# EAGLE board barath pcb 3 (EAGLE 6.5.0)
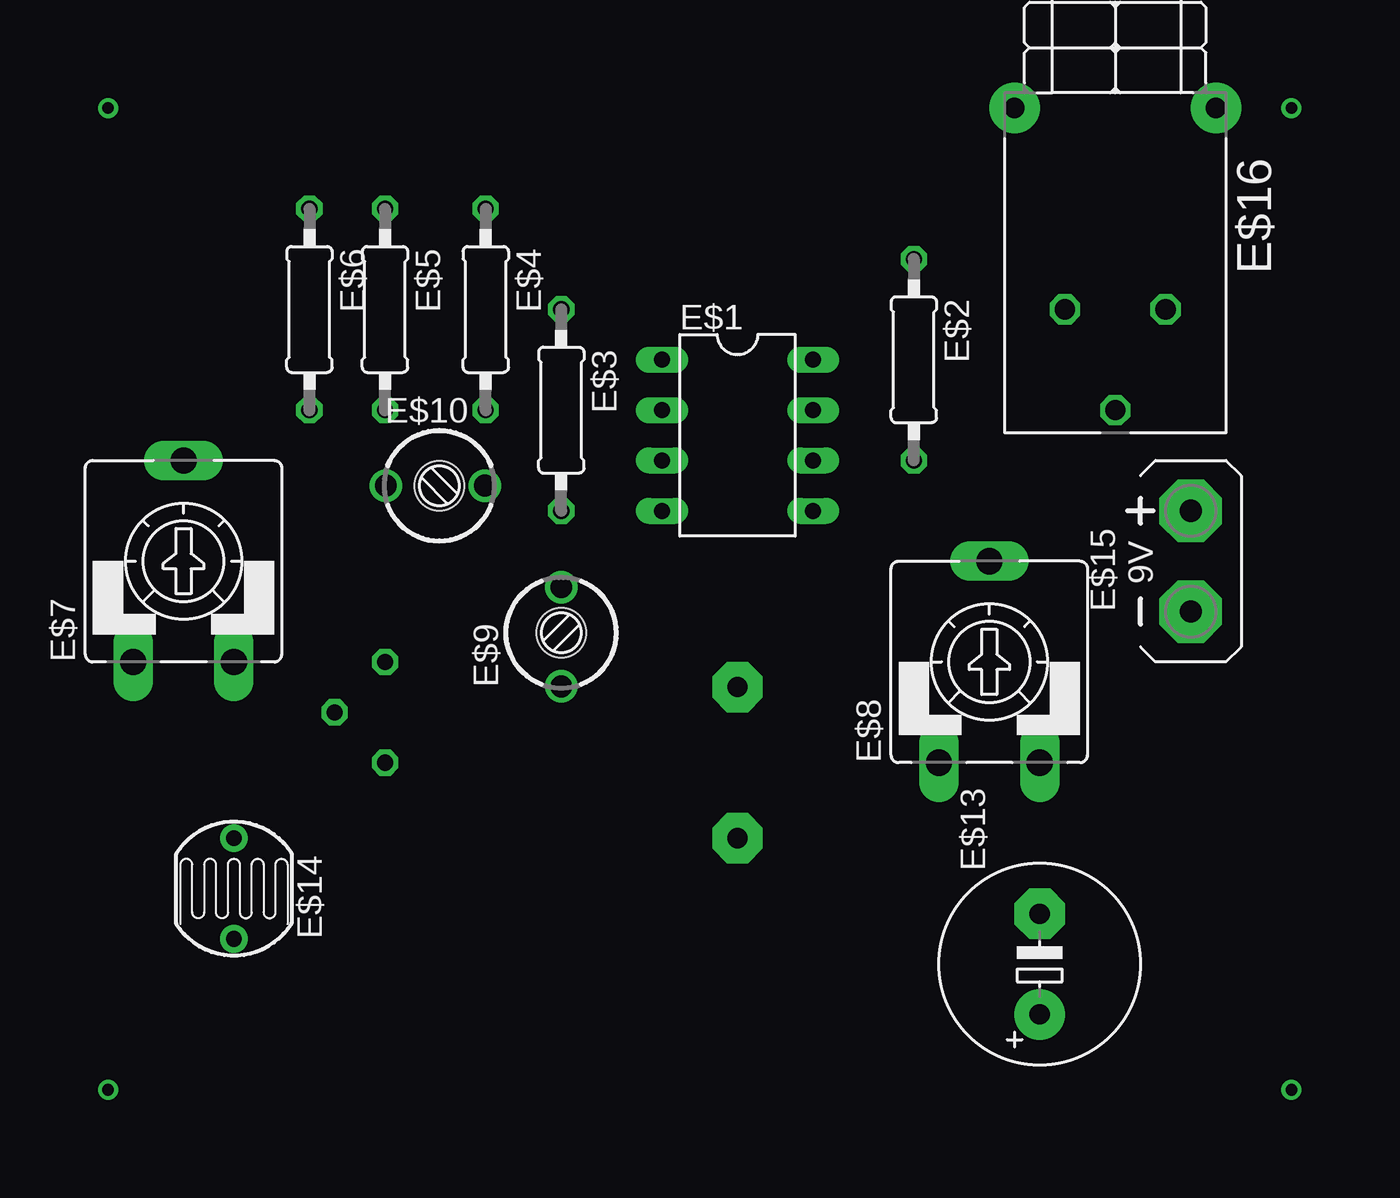
[diagram p0: board, top side]
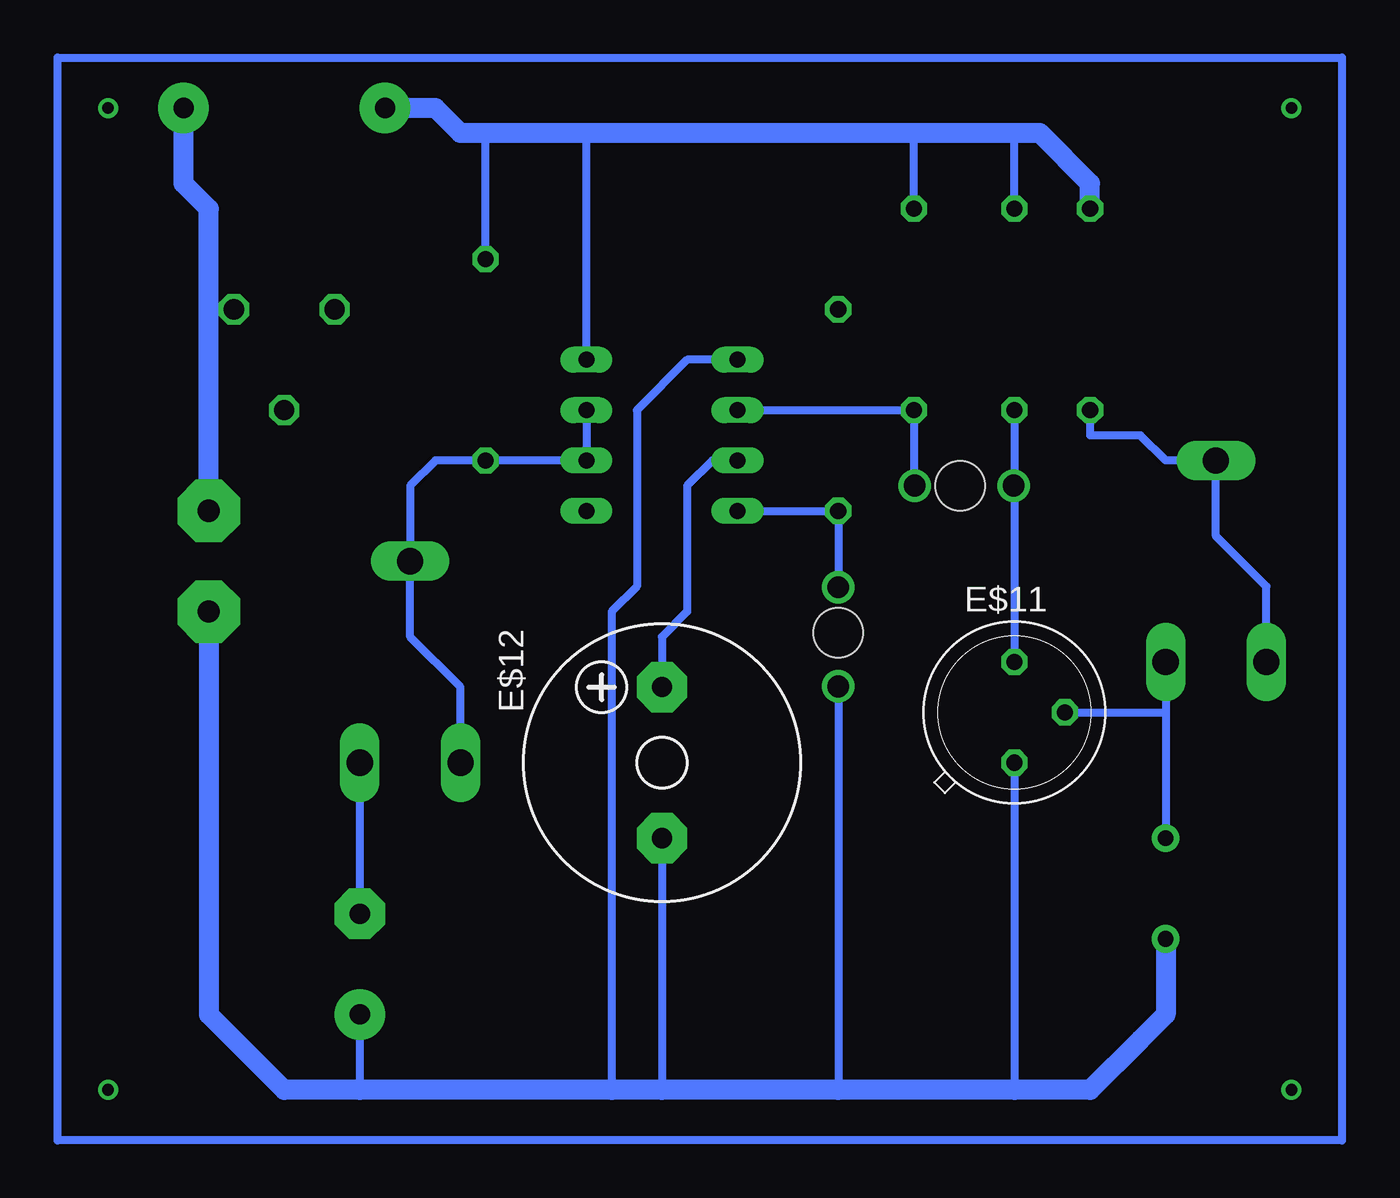
[diagram p1: board, bottom side, seen from below]

No outline drawn. Coordinates in mm, seen from the top.
Copper layers (1*16): Top 0.035mm / dielectric 1.5mm / Bottom 0.035mm
Design rules "default": minimum track width 10mil, minimum drill 24mil, track to track 8mil, track to pad 8mil, pad to pad 8mil, via to via 8mil, smd to smd 8mil, copper to edge 40mil, drill to drill 8mil, minimum pad ring 10mil, minimum via ring 8mil, stop-mask expansion 4mil, vias tented up to drill 0mil, thermal gap 10mil

## Footprints (pad centres in the part's own frame; a part is rotated, then mirrored left to right if it is on the bottom)
DIL08 = drill 0.813 long: 1 -3.81,-3.81; 2 -1.27,-3.81; 3 1.27,-3.81; 4 3.81,-3.81; 5 3.81,3.81; 6 1.27,3.81; 7 -1.27,3.81; 8 -3.81,3.81
0207/10 = drill 0.813 octagon: 1 -5.08,0; 2 5.08,0
CA9V = drill 1.321 long: A -2.54,-5.08; E 2.54,-5.08; S 0,5.08
CTRIM3050.505 = drill 1.1: 1 -2.5,0; 2 2.5,0 | hole 2.5: 0.2,0
TO5 = drill 0.813 octagon: 1 0,-2.54; 2 2.54,0; 3 0,2.54
F/CM12P = drill 1.016 pad 2.54 octagon: + 3.81,0; - -3.81,0
E5-10,5 = drill 1.016 pad 2.54: + -2.54,0 | drill 1.016 pad 2.54 octagon: - 2.54,0
VT800 = drill 0.8 pad 1.4: 1 -2.54,0; 2 2.54,0
AB9V = drill 1.118 pad 3.15 octagon: + 0,2.54; - 0,-2.54
316-917 = drill 1.016 octagon: 1 10.16,2.54; 2 15.24,0; 3 10.16,-2.54 | drill 1.016 pad 2.54: B 0,-5.08; B1 0,5.08

## Placement (x,y rotation side)
E$1  [DIL08]  73.66,49.53 270 top
E$2  [0207/10]  82.55,53.34 270 top
E$3  [0207/10]  64.77,50.8 270 top
E$4  [0207/10]  60.96,55.88 270 top
E$5  [0207/10]  55.88,55.88 270 top
E$6  [0207/10]  52.07,55.88 270 top
E$7  [CA9V]  45.72,43.18 0 top
E$8  [CA9V]  86.36,38.1 0 top
E$9  [CTRIM3050.505]  64.77,39.37 90 top
E$10  [CTRIM3050.505]  58.42,46.99 0 top
E$11  [TO5]  55.88,35.56 0 bottom
E$12  [F/CM12P]  73.66,33.02 90 bottom
E$13  [E5-10,5]  88.9,22.86 90 top
E$14  [VT800]  48.26,26.67 90 top
E$15  [AB9V]  96.52,43.18 0 top
E$16  [316-917]  92.71,66.04 270 top

## Library data of the parts
E$1 = ic-package
E$2-E$6 E$9 E$10 E$13 = resistor
E$7 E$8 = pot
E$11 = transistor
E$12 = buzzer
E$14 = photo-elements
E$15 = battery
E$16 = switch

## Nets
S$2: E$1.8 E$2.1 E$4.1 E$5.1 E$6.1 E$16.B
S$3: E$15.+ E$16.B1
S$4: E$1.4 E$3.2
S$5: E$1.6 E$1.7 E$2.2 E$8.A E$8.S
S$6: E$1.3 E$12.+
S$7: E$1.1 E$11.1 E$12.- E$13.+ E$14.1 E$15.-
S$8: E$8.E E$13.-
S$9: E$1.2 E$4.2
S$10: E$5.2 E$11.3
S$11: E$6.2 E$7.A E$7.S
S$12: E$7.E E$11.2 E$14.2

## Tracks (layer width: path | path; a pad name or v marks a point on that pad's centre or on a via)
S$1
  Bottom 0.406: 39.37,13.97 104.14,13.97 104.14,68.58 39.37,68.58 39.37,13.97
S$2
  Bottom 0.406: E$2.1 82.55,64.77 | E$1.8 77.47,64.77 | E$4.1 60.96,64.77 | E$5.1 55.88,64.77
  Bottom 1.016: E$6.1 52.07,62.23 54.61,64.77 55.88,64.77 60.96,64.77 77.47,64.77 82.55,64.77 83.82,64.77 85.09,66.04 E$16.B
S$3
  Bottom 1.016: E$15.+ 96.52,60.96 97.79,62.23 E$16.B1
S$4
  Bottom 0.406: E$1.4 E$3.2 64.77,41.91
S$5
  Bottom 0.406: E$1.7 E$1.6 E$2.2 85.09,48.26 86.36,46.99 E$8.S 86.36,39.37 83.82,36.83 E$8.A
S$6
  Bottom 0.406: E$1.3 71.12,48.26 72.39,46.99 72.39,40.64 73.66,39.37 E$12.+
S$7
  Bottom 0.406: E$1.1 72.39,53.34 74.93,50.8 74.93,41.91 76.2,40.64 76.2,16.51 | 64.77,36.83 64.77,16.51 | E$11.1 55.88,16.51 | E$13.+ 88.9,16.51 | E$12.- 73.66,16.51
  Bottom 1.016: E$15.- 96.52,20.32 92.71,16.51 88.9,16.51 76.2,16.51 73.66,16.51 64.77,16.51 55.88,16.51 52.07,16.51 49.53,19.05 48.26,20.32 E$14.1
S$8
  Bottom 0.406: E$8.E E$13.-
S$9
  Bottom 0.406: E$1.2 E$4.2 60.96,46.99
S$10
  Bottom 0.406: E$5.2 E$11.3
S$11
  Bottom 0.406: E$7.A 43.18,41.91 45.72,44.45 E$7.S 48.26,48.26 49.53,49.53 52.07,49.53 E$6.2
S$12
  Bottom 0.406: E$7.E 48.26,35.56 | 48.26,35.56 E$14.2 | E$11.2 48.26,35.56
S$13  (via drill 0.6)
  other vias: 41.91,66.04
S$14  (via drill 0.6)
  other vias: 41.91,16.51
S$15  (via drill 0.6)
  other vias: 101.6,16.51
S$16  (via drill 0.6)
  other vias: 101.6,66.04